# EAGLE board Nintendo64 (EAGLE 9.6.2)
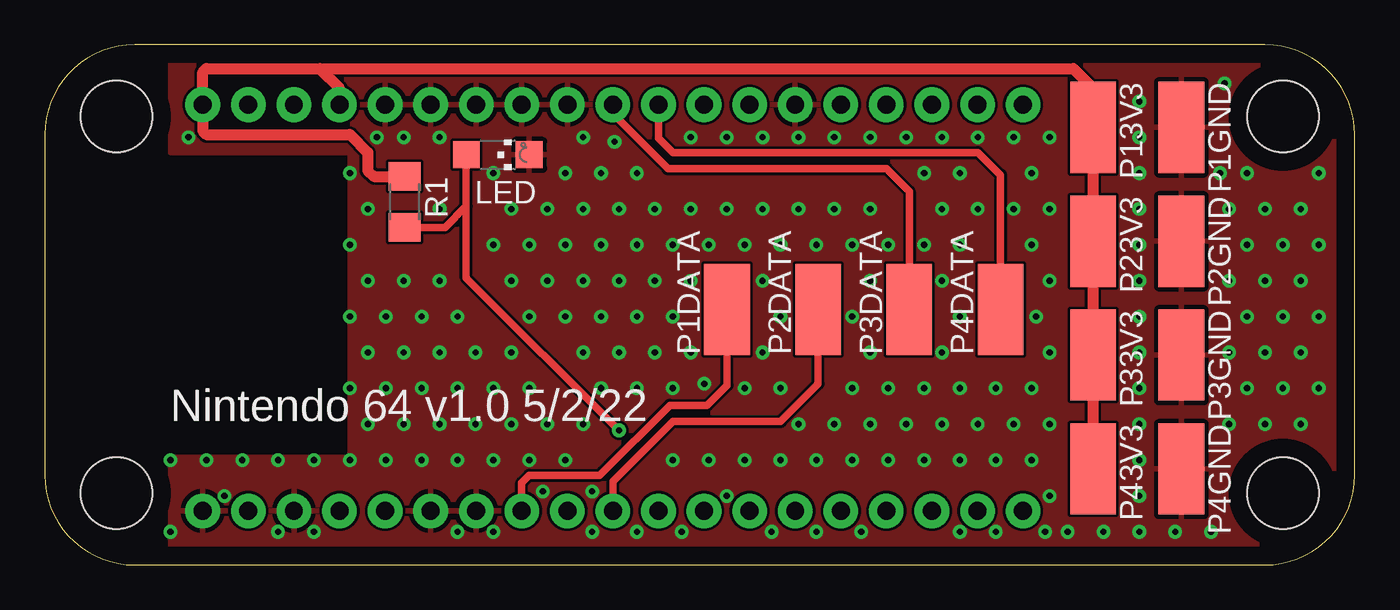
[diagram p0: board, top side]
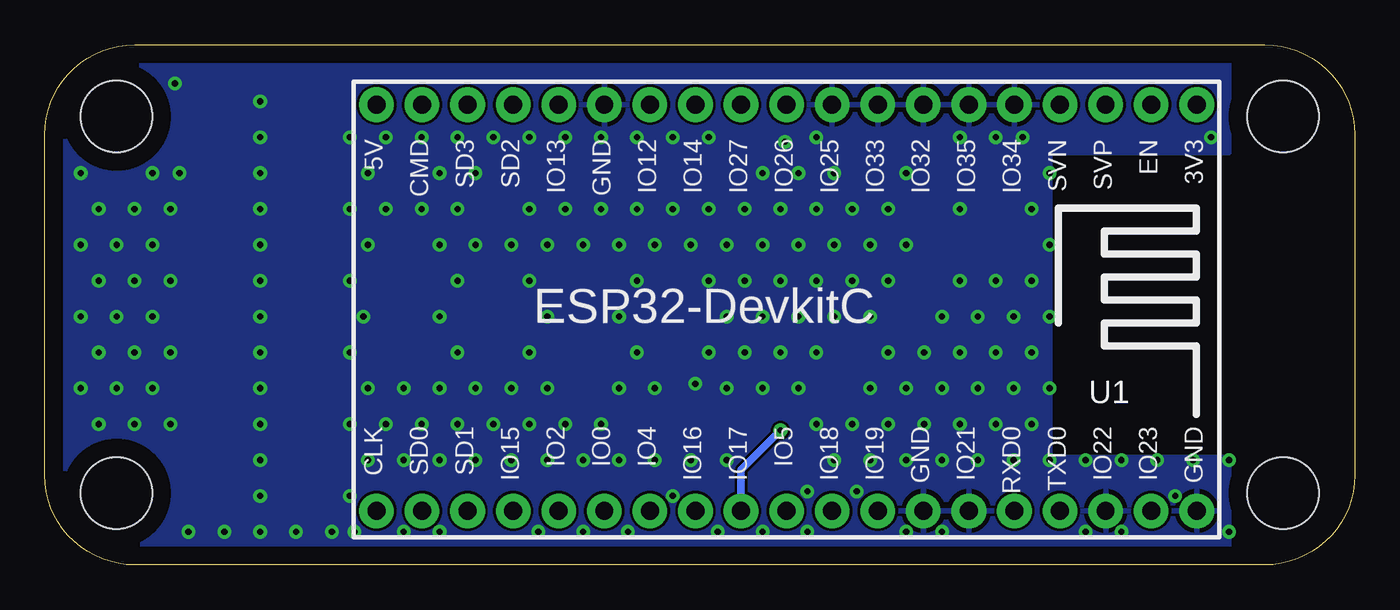
[diagram p1: board, bottom side, seen from below]

Size 73 x 29 mm. Coordinates in mm from the lower left corner, seen from the top.
Outline: 0,24 0,5 arc90 5,0 68,0 arc90 73,5 73,24 arc90 68,29 5,29 arc90 0,24
Copper layers (1*16): Top 0.035mm / dielectric 1.5mm / Bottom 0.035mm
Design rules "default": minimum track width 6mil, minimum drill 0.35mm, track to track 6mil, track to pad 6mil, pad to pad 6mil, via to via 6mil, smd to smd 6mil, copper to edge 40mil, drill to drill 6mil, minimum pad ring 10mil, minimum via ring 8mil, stop-mask expansion 4mil, vias tented up to drill 0.5mm, thermal gap 10mil
Holes 4 mm at 4,4 4,25 69,25 69,4

## Footprints (pad centres in the part's own frame; a part is rotated, then mirrored left to right if it is on the bottom)
CHIPLED_1206 = smd 1.5 x 1.5: A 0,-1.75; C 0,1.75
SMD2,54-5,08 = smd 2.54 x 5.08: 1 0,0
R1206 = smd 1.6 x 1.803: 1 -1.422,0; 2 1.422,0
ESP32-DEVKITC = drill 1 pad 1.93: 1 -22.87,-11.42; 2 -20.33,-11.42; 3 -17.79,-11.42; 4 -15.25,-11.42; 5 -12.71,-11.42; 6 -10.17,-11.42; 7 -7.63,-11.42; 8 -5.09,-11.42; 9 -2.55,-11.42; 10 -0.01,-11.42; 11 2.53,-11.42; 12 5.07,-11.42; 13 7.61,-11.42; 14 10.15,-11.42; 15 12.69,-11.42; 16 15.23,-11.42; 17 17.77,-11.42; 18 20.31,-11.42; 19 22.85,-11.42; 20 22.85,11.23; 21 20.31,11.23; 22 17.77,11.23; 23 15.23,11.23; 24 12.69,11.23; 25 10.15,11.23; 26 7.61,11.23; 27 5.07,11.23; 28 2.53,11.23; 29 -0.01,11.23; 30 -2.55,11.23; 31 -5.09,11.23; 32 -7.63,11.23; 33 -10.17,11.23; 34 -12.71,11.23; 35 -15.25,11.23; 36 -17.79,11.23; 37 -20.33,11.23; 38 -22.87,11.23

## Placement (x,y rotation side)
LED  [CHIPLED_1206]  25.24,22.87 270 top
P1DATA  [SMD2,54-5,08]  38.02,14.24 0 top
P1GND  [SMD2,54-5,08]  63.34,24.4 180 top
P2DATA  [SMD2,54-5,08]  43.1,14.24 0 top
P2GND  [SMD2,54-5,08]  63.34,18.05 180 top
P3DATA  [SMD2,54-5,08]  48.18,14.24 0 top
P3GND  [SMD2,54-5,08]  63.34,11.7 180 top
P4DATA  [SMD2,54-5,08]  53.26,14.24 0 top
P4GND  [SMD2,54-5,08]  63.34,5.35 180 top
P13V3  [SMD2,54-5,08]  58.42,24.4 180 top
P23V3  [SMD2,54-5,08]  58.42,18.05 180 top
P33V3  [SMD2,54-5,08]  58.42,11.7 180 top
P43V3  [SMD2,54-5,08]  58.42,5.35 180 top
R1  84  [R1206]  20.05,20.24 270 top
U1  ESP32DEVKITC  [ESP32-DEVKITC]  31.67,14.24 180 bottom

## Library data of the parts
LED R1 = adafruit
P1DATA P1GND P2DATA P2GND P3DATA P3GND P4DATA P4GND P13V3 P23V3 P33V3 P43V3 = wirepad
U1 = ESP32-DEVKITC

## Nets
3V3: P13V3.1 P23V3.1 P33V3.1 P43V3.1 R1.1 U1.1 U1.4
GND: LED.C P1GND.1 P2GND.1 P3GND.1 P4GND.1 U1.5 U1.6 U1.7 U1.8 U1.9 U1.14 U1.32 U1.33 U1.36 U1.38
LED: LED.A R1.2 U1.28
P1DATA: P1DATA.1 U1.31
P2DATA: P2DATA.1 U1.29
P3DATA: P3DATA.1 U1.10
P4DATA: P4DATA.1 U1.11

## Tracks (layer width: path | path; a pad name or v marks a point on that pad's centre or on a via)
3V3
  Top 0.61: P43V3.1 P33V3.1 P23V3.1 P13V3.1 58.42,26.58 57.32,27.68 15.32,27.68 | R1.1 18.34,21.66 18,22 18,23 17,24 9,24 8.8,24.2 U1.1 8.8,27.48 9,27.68 15.32,27.68 | U1.4 16.42,26.58 15.32,27.68
GND  (via drill 0.35)
  other vias: 7,1.85 7,5.85 9,5.85 8,23.85 10,3.85 11,5.85 13,1.85 13,5.85 15,1.85 15,5.85 17,5.85 17,9.85 17,13.85 17,17.85 17,21.85 19,5.85 18,7.85 19,9.85 18,11.85 19,13.85 18,15.85 18,19.85 18.5,23.85 21,5.85 20,7.85 21,9.85 20,11.85 21,13.85 20,15.85 20,23.85 23,1.85 23,5.85 22,7.85 23,9.85 22,11.85 23,13.85 22,15.85 22,19.85 22,23.85 25,1.85 25,5.85 24,7.85 25,9.85 24,11.85 25,17.85 25,21.85 27,5.85 26,7.85 27,9.85 26,11.85 27,13.85 26,15.85 27,17.85 26,19.85 27.75,4.1 29,5.85 28,7.85 29,13.85 28,15.85 29,17.85 28,19.85 29,21.85 30.5,1.85 30.5,4.1 30,7.85 31,9.85 30,11.85 31,13.85 30,15.85 31,17.85 30,19.85 31,21.85 30,23.85 33,1.85 33,9.85 32,11.85 33,13.85 32,15.85 33,17.85 32,19.85 33,21.85 31.75,23.6 35.5,1.85 35,5.85 35,9.85 34,11.85 35,13.85 34,15.85 35,17.85 34,19.85 37,5.85 36.75,10.1 36,11.85 36,15.85 37,17.85 36,19.85 36,23.85 38,3.85 39,5.85 39,9.85 39,17.85 38,19.85 38,23.85 40.5,1.85 41,5.85 41,9.85 40,11.85 41,13.85 40,15.85 41,17.85 40,19.85 40,23.85 43,1.85 43,5.85 42,7.85 43,17.85 42,19.85 42,23.85 45.5,1.85 45,5.85 44,7.85 45,9.85 45,13.85 45,17.85 44,19.85 44,23.85 47,5.85 46,7.85 47,9.85 46,11.85 46,15.85 47,17.85 46,19.85 46,23.85 49,5.85 48,7.85 49,9.85 49,17.85 49,21.85 48,23.85 51,1.85 51,5.85 50,7.85 51,9.85 50,11.85 51,13.85 50,15.85 51,17.85 50,19.85 51,21.85 50,23.85 53,1.85 53,5.85 52,7.85 53,9.85 52,19.85 52,23.85 55.75,1.85 55,5.85 54,7.85 55,9.85 55.25,13.85 55,17.85 54,19.85 55,21.85 54,23.85 57,1.85 56,3.85 56,7.85 56,11.85 56,15.85 56,19.85 56,23.85 59,1.85 61,1.85 61,3.85 61,5.85 61,7.85 61,9.85 61,11.85 61,13.85 61,15.85 61,17.85 61,19.85 61,21.85 61,23.85 61,25.85 63,1.85 65,1.85 65.5,21.85 65.75,26.85 66,7.85 67,9.85 66,11.85 67,13.85 66,15.85 67,17.85 66,19.85 67,21.85 68,7.85 69,9.85 68,11.85 69,13.85 68,15.85 69,17.85 68,19.85 70,7.85 71,9.85 70,11.85 71,13.85 70,15.85 71,17.85 70,19.85 71,21.85
  pour Top: 7,29 7,23 17,23 17,6 7,6 7,0 73,0 73,29
  pour Bottom: 7,0 73,0 73,29 7,29 7,23 17,23 17,6 7,6
LED  (via drill 0.35)
  Top 0.406: v32,7.5 23.49,16.01 23.49,20 | 23.49,20 LED.A | R1.2 22.31,18.82 23.49,20
  Bottom 0.406: v32,7.5 34.2,5.3 U1.28
P1DATA
  Top 0.406: U1.31 26.58,4.58 27,5 30.93,5 34.83,8.91 36.91,8.91 38.02,10.02 P1DATA.1
P2DATA
  Top 0.406: U1.29 31.66,4.66 35,8 41,8 43.1,10.1 P2DATA.1
P3DATA
  Top 0.406: U1.10 31.66,25.16 34.73,22.09 46.91,22.09 48.18,20.82 P3DATA.1
P4DATA
  Top 0.406: U1.11 34.2,23.8 35,23 52,23 53.26,21.74 P4DATA.1

## Text on the board
tNames: Nintendo 64 v1.0 5/2/22